# Altium PCB PCB4.PcbDoc
Units mm, origin at the board's own origin, x right, y up, seen from the top; angles counter-clockwise.
Board outline 81.67 x 20.7 mm, 2 copper layers (Top Layer, Bottom Layer), stack 1.671 mm thick; 18 components, 16 nets, 80 pads, 12 vias.
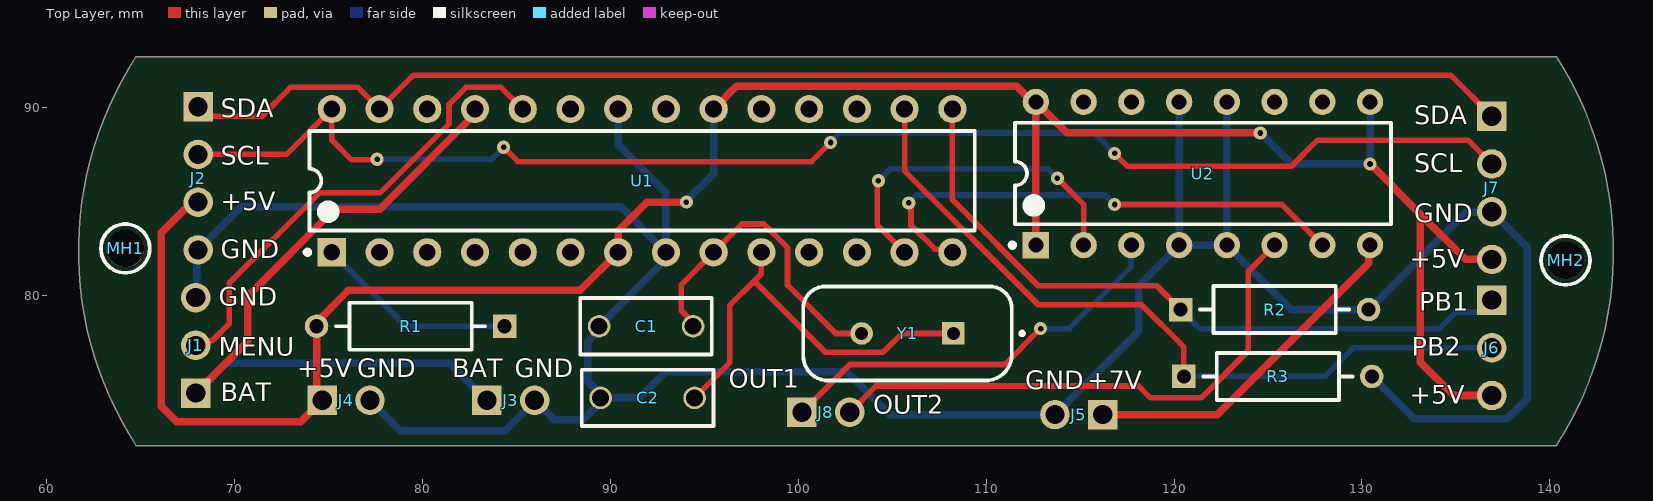
[diagram p0: Top Layer view]
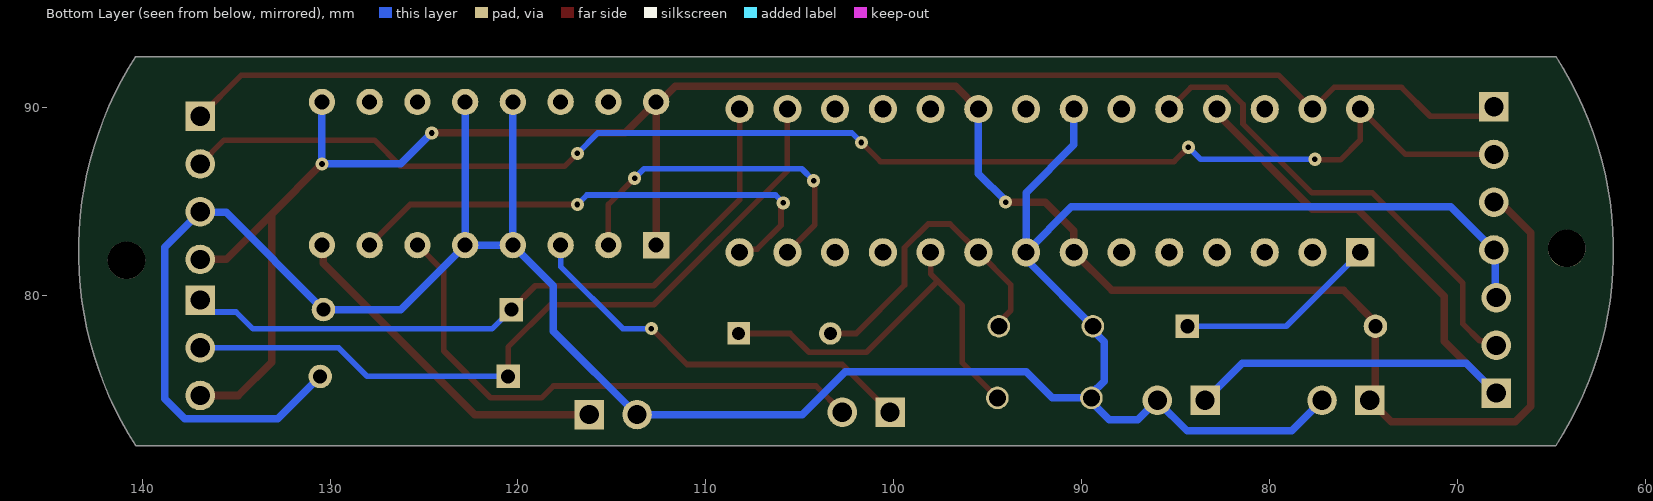
[diagram p1: Bottom Layer view, seen from below]

## Layer stack, top to bottom
Top Solder: solder mask 0.0102, Solder Resist, Dk 3.5
Top Layer: signal copper 0.0356
Dielectric 1: dielectric 1.6, FR-4, Dk 4.8
Bottom Layer: signal copper 0.0356
Bottom Solder: solder mask 0.0102, Solder Resist, Dk 3.5

## Board outline
64.77,72.009 cw(c80.725,82.359) 64.77,92.71 140.335,92.71 cw(c124.287,82.359) 140.335,72.009

## Design rules (kind name [scope] priority, off if disabled: settings)
AssemblyTestpoint [All] p1: testpointundercomponent=TRUE minsize=0.7 maxsize=2.54 preferedsize=0.7 minholesize=0 maxholesize=1.016 preferedholesize=0.3 testpointgrid=0.025 usegrid=TRUE gridtolerance=0 allowsidetop=TRUE allowsidebottom=TRUE
Clearance [All] p1: gap=0.254 ignorepadtopadclearanceinfootprint=FALSE except(0.33: Arc-Hole Track-Hole; 0.5: THPad-THPad)
FabricationTestpoint [All] p1: side=3 testpointundercomponent=TRUE minsize=0.7 maxsize=2.54 preferedsize=0.7 minholesize=0 maxholesize=1.016 preferedholesize=0.3 testpointgrid=0.025 allowsidetop=TRUE allowsidebottom=TRUE usegrid=TRUE gridtolerance=0
HoleSize [All] p1: absolutevalues=TRUE maxlimit=10 minlimit=0.2 maxpercent=80.000 minpercent=20.000
HoleToHoleClearance [All] p1: gap=0.5 allowstackedmicrovias=TRUE
PolygonConnect [All] p1: connectstyle=Relief reliefconductorwidth=0.254 reliefentries=4 polygonreliefangle="90 Angle" airgapwidth=0.254
RoutingVias [All] p1: holewidth=0.711 width=1.27 viastyle="Through Hole" minholewidth=0.3 minwidth=0.5 maxholewidth=0.711 maxwidth=1.27
SolderMaskExpansion [All] p1: expansion=0.102 istentingtop=FALSE
Width Power_nets [InNet('GND') or InNet('BAT') or InNet('+5V') or InNet('7V')] p1: maxlimit=4 minlimit=0.4 preferedwidth=0.4
Width [All] p2: maxlimit=0.5 minlimit=0.3 preferedwidth=0.3
26 further rules are at their usual default settings.

## Components (designator, comment, footprint, x,y, rotation, side; value= is the part's Value field where it differs from the comment)
C1 "22pF" CAPACITOR_22PF 94.408,78.359 r180 top locked
C2 "22pF" CAPACITOR_22PF 94.488,74.549 r180 top locked
J1 "PAD3 1.02X1.57MM" "PAD3 1.02X1.57MM" 67.945,74.803 r180 top
J2 "PAD4 1.02X1.57MM" "PAD4 1.02X1.57MM" 68.072,90.043 r0 top
J3 "PAD2 1.02X1.57MM" "PAD2 1.02X1.57MM" 83.439,74.422 r90 top
J4 "PAD2 1.02X1.57MM" "PAD2 1.02X1.57MM" 74.676,74.422 r90 top
J5 "PAD2 1.02X1.57MM" "PAD2 1.02X1.57MM" 116.205,73.66 r270 top
J6 "PAD3 1.02X1.57MM" "PAD3 1.02X1.57MM" 136.906,79.756 r0 top
J7 "PAD4 1.02X1.57MM" "PAD4 1.02X1.57MM" 136.906,89.535 r0 top
J8 "PAD2 1.02X1.57MM" "PAD2 1.02X1.57MM" 100.203,73.787 r90 top
MH1 "MH" MH 64.169,82.535 r0 top
MH2 "MH" MH 140.8,81.9 r0 top
R1 "1k" resistor 79.375,78.359 r180 top
R2 "1k" resistor 125.349,79.248 r0 top
R3 "1k" resistor 125.523,75.692 r0 top locked
U1 "ATMEGA328-PU" "DIP28 7.62MM" 91.694,86.106 r90 top locked
U2 "L293D" DIP16 121.539,86.487 r90 top locked
Y1 "HC49US16MHz" HC49US16MHz 105.818,77.978 r180 top

## Footprints (in the part's own frame and the unit in brackets; to place one, negate y for a bottom-side part, rotate by r counter-clockwise, add the part's x,y. Pads: shape width x height; smd on the part's side, far side on the other; paste and mask are expansions set on the pad)
CAPACITOR_22PF [mm]
  round 1.2 hole 0.9: 1(0,0) 2(5,0)
  silkscreen extent -1,-1.5 6,1.5
DIP16 [mm]
  rect 1.4x1.4 hole 0.8: 1(-3.81,8.89)
  round 1.4 hole 0.8: 2(-3.81,6.35) 3(-3.81,3.81) 4(-3.81,1.27) 5(-3.81,-1.27) 6(-3.81,-3.81) 7(-3.81,-6.35) 8(-3.81,-8.89) 9(3.81,-8.89) 10(3.81,-6.35) 11(3.81,-3.81) 12(3.81,-1.27) 13(3.81,1.27) 14(3.81,3.81) 15(3.81,6.35) 16(3.81,8.89)
  silkscreen extent -3.93,-10 2.7,10.26, body extent -3.93,-10 3.93,10, height 5.1
"DIP28 7.62MM" [mm]
  rect 1.5x1.5 hole 0.9: 1(-3.81,16.51)
  round 1.5 hole 0.9: 2(-3.81,13.97) 3(-3.81,11.43) 4(-3.81,8.89) 5(-3.81,6.35) 6(-3.81,3.81) 7(-3.81,1.27) 8(-3.81,-1.27) 9(-3.81,-3.81) 10(-3.81,-6.35) 11(-3.81,-8.89) 12(-3.81,-11.43) 13(-3.81,-13.97) 14(-3.81,-16.51) 15(3.81,-16.51) 16(3.81,-13.97) 17(3.81,-11.43) 18(3.81,-8.89) 19(3.81,-6.35) 20(3.81,-3.81) 21(3.81,-1.27) 22(3.81,1.27) 23(3.81,3.81) 24(3.81,6.35) 25(3.81,8.89) 26(3.81,11.43) 27(3.81,13.97) 28(3.81,16.51)
  silkscreen extent -3.93,-17.7 2.65,17.93, body extent -3.94,-17.91 3.94,18.03, height 4.65
HC49US16MHz [mm]
  rect 1.2x1.2 hole 0.7: 1(-2.44,0)
  round 1.2 hole 0.7: 2(2.44,0)
  silkscreen extent -6.2,-2.5 5.55,2.5, body extent -5.4,-2.25 5.4,2.25, height 3.6
MH [mm]
  round 2 hole 2: 1(0.031,-0.035)
  silkscreen extent -1.27,-1.33 1.33,1.26
"PAD2 1.02X1.57MM" [mm]
  rect 1.57x1.57 hole 1.02: 1(0,0)
  round 1.57 hole 1.02: 2(0,-2.54)
"PAD3 1.02X1.57MM" [mm]
  rect 1.57x1.57 hole 1.02: 1(0,0)
  round 1.57 hole 1.02: 2(0,-2.54) 3(0,-5.08)
"PAD4 1.02X1.57MM" [mm]
  rect 1.57x1.57 hole 1.02: 1(0,0)
  round 1.57 hole 1.02: 2(0,-2.54) 3(0,-5.08) 4(0,-7.62)
resistor [mm]
  rect 1.25x1.25 hole 0.75 paste-1000 mask+0: 1(-5,0)
  round 1.25 hole 0.75 paste-1000 mask+0: 2(5,0)
  silkscreen extent -3.98,-1.25 3.98,1.25, body extent -5.72,-1.35 5.72,1.35, height 0.25

## Part data
C1 C2: library part VY1220K31U2JQ63V0, "Cap Ceramic Suppression X1/Y2 22pF 760VAC/500VAC U2J 10% (8 X 5mm) Radial 10mm 125C Bulk", Case/Package=Radial, Dielectric=U2J, Manufacturer="Vishay BCcomponents", Max Operating Temperature=125°C, Min Operating Temperature=-40°C, Package Quantity=1000, Ratings=X1,Y1, Supplier Part Number 1=72-VY1220K31U2JQ63V0, Temperature Coefficient=120ppm/°C, Tolerance=10%, Voltage Rating=500V, Voltage Rating (DC)=250V, Body Diameter=8mm, Capacitance=22pF, Category="Ceramic Capacitors", ComponentLink1Description=https://datasheet.ciiva.com/149/vy1series-149110.pdf?src-supplier=Digi-Key, ComponentLink1URL=https://datasheet.ciiva.com/149/vy1series-149110.pdf?src-supplier=Digi-Key, ComponentLink2Description=https://datasheet.ciiva.com/5711/1339573-5711482.pdf?src-supplier=Farnell, ComponentLink2URL=https://datasheet.ciiva.com/5711/1339573-5711482.pdf?src-supplier=Farnell, Construction=RADIAL, Depth=5mm, Diameter=8mm, Lead Diameter=0.6mm, Lead Length=30mm, Lead Pitch=10mm, Lead/Base Style=Kinked, Manufacturer Part Number=VY1220K31U2JQ63V0, Mount="Through Hole", Number of Pins=2, Packaging=Bulk, Pricing 1="1=0.37000, 10=0.17900, 50=0.17900, 100=0.15300, 1000=0.09400, 10000=0.08100 (USD)", RoHS=Yes, RoHS Compliant=Yes, Series=VY1, Stock 1=27652, Supplier 1=Mouser, Termination=Radial, Thickness=5mm, Voltage Rating (AC)=500V, Width=5mm
R1 R2 R3: library part MRS25000C1001FCT00, "MRS25 Series Axial Thin Film Resistor 1kOhms +/-1% 0.6W +/-50ppm/degC", Case/Package=Axial, Manufacturer=Vishay, Max Operating Temperature=155°C, Max Power Dissipation=600mW, Min Operating Temperature=-55°C, Package Quantity=5000, Resistance=1kR, Resistance Tolerance=1%, Resistor Type="Metal Film,Thin Film", Supplier Part Number 1=594-MRS251K1%TR, Temperature Coefficient=50ppm/°C, Voltage Rating=350V, Category="Through-Hole Resistors", ComponentLink1Description=https://datasheet.ciiva.com/46412/1756157-46412631.pdf?src-supplier=Element14, ComponentLink1URL=https://datasheet.ciiva.com/46412/1756157-46412631.pdf?src-supplier=Element14, ComponentLink2Description=https://datasheet.ciiva.com/28605/1911198-28605880.pdf?src-supplier=Element14, ComponentLink2URL=https://datasheet.ciiva.com/28605/1911198-28605880.pdf?src-supplier=Element14, ComponentLink3Description=https://datasheet.ciiva.com/7836/mrs16m25-7836234.pdf?src-supplier=Element14, ComponentLink3URL=https://datasheet.ciiva.com/7836/mrs16m25-7836234.pdf?src-supplier=Element14, ComponentLink4Description=https://datasheet.ciiva.com/8401/mrs16m25-8401227.pdf?src-supplier=Avnet, ComponentLink4URL=https://datasheet.ciiva.com/8401/mrs16m25-8401227.pdf?src-supplier=Avnet, ComponentLink5Description=https://datasheet.ciiva.com/16464/mrs16m25-16464630.pdf?src-supplier=Future+Electronics, ComponentLink5URL=https://datasheet.ciiva.com/16464/mrs16m25-16464630.pdf?src-supplier=Future+Electronics, Contact Plating=Tin, Diameter=2.5mm, Lead Diameter=0.6mm, Lead Free="Lead Free", Length=6.5mm, Manufacturer Part Number=MRS25000C1001FCT00, Number of Pins=2, Number of Terminations=2, Packaging="Tape and Reel", Power Rating=600mW, Pricing 1="1=0.28000, 10=0.24200, 50=0.24200, 100=0.09500, 1000=0.04000, 10000=0.03300 (USD)", Radiation Hardening=No, Reach SVHC Compliant=Unknown, RoHS=Yes, RoHS Compliant=Yes, Series=MRS25, Stock 1=28607, Supplier 1=Mouser, Technology="THIN FILM", Termination=Axial, Tolerance=1%, Voltage Rating (DC)=350V, Weight=0.00776oz, Width=2.5mm
U1: "ATmega Series 32 kB Flash 2 kB SRAM 20 MHz 8-Bit Microcontroller - DIP-28", Case/Package=PDIP, Frequency=20MHz, Manufacturer=Microchip, Max Operating Temperature=85°C, Max Supply Voltage=5.5V, Min Operating Temperature=-40°C, Min Supply Voltage=1.8V, Supplier Part Number 1=1310277P, Core Architecture=AVR, Data Bus Width=8b, Height=4.572mm, Lead Free="Lead Free", Length=34.8mm, Manufacturer Part Number=ATMEGA328-PU, Max Frequency=20MHz, Memory Size=32KB, Memory Type=FLASH, Mount="Through Hole", Number of ADC Channels=6, Number of I2C Channels=1, Number of I/Os=23, Number of Pins=28, Number of PWM Channels=6, Number of SPI Channels=1, Number of Timers/Counters=3, Peripherals=POR,PWM,WDT, Pricing 1="25=0.41080, 100=0.39560 (GBP)", RAM Size=2KB, Reach SVHC Compliant=No, RoHS=Yes, RoHS Compliant=Yes, Stock 1=871, Supplier 1=Rs, Watchdog Timer=Yes, Width=7.49mm
U2: "IC MOTOR DRIVER PAR 16-DIP", Case/Package=DIP, Manufacturer=STMicroelectronics, Max Collector Current=1.2A, Max Operating Temperature=150°C, Max Supply Voltage=36V, Min Operating Temperature=-40°C, Min Supply Voltage=4.5V, Operating Supply Current=2mA, Operating Supply Voltage=24V, Output Current=600mA, Power Dissipation=4W, Supplier Part Number 1=511-L293D, Category="Motor Drivers", ComponentLink1Description=https://datasheet.ciiva.com/14150/ocl293d-647107-dat-en-14150297.pdf?src-supplier=Distrelec, ComponentLink1URL=https://datasheet.ciiva.com/14150/ocl293d-647107-dat-en-14150297.pdf?src-supplier=Distrelec, ComponentLink2Description=https://datasheet.ciiva.com/15109/getdatasheetpartid-121660-15109379.pdf?src-supplier=Verical, ComponentLink2URL=https://datasheet.ciiva.com/15109/getdatasheetpartid-121660-15109379.pdf?src-supplier=Verical, ComponentLink3Description=https://datasheet.ciiva.com/29307/156134-da-01-en-4-kanal-treiber-ic-l293d-stm-29307000.pdf?src-supplier=Conrad, ComponentLink3URL=https://datasheet.ciiva.com/29307/156134-da-01-en-4-kanal-treiber-ic-l293d-stm-29307000.pdf?src-supplier=Conrad, ComponentLink4Description=https://datasheet.ciiva.com/1955/cd00000059-1955400.pdf?src-supplier=Digi-Key, ComponentLink4URL=https://datasheet.ciiva.com/1955/cd00000059-1955400.pdf?src-supplier=Digi-Key, ComponentLink5Description=https://datasheet.ciiva.com/4895/cd00000059-4895945.pdf?src-supplier=Mouser, ComponentLink5URL=https://datasheet.ciiva.com/4895/cd00000059-4895945.pdf?src-supplier=Mouser, ComponentLink6Description=https://datasheet.ciiva.com/16458/cd00000059-16458220.pdf?src-supplier=Future+Electronics, ComponentLink6URL=https://datasheet.ciiva.com/16458/cd00000059-16458220.pdf?src-supplier=Future+Electronics, Height=5.1mm, Interface=Parallel, Lead Free="Lead Free", Length=20mm, Manufacturer Part Number=L293D, Motor Type=Brushed, Mount="Through Hole", Number of Channels=4, Number of Outputs=2, Number of Pins=16, Packaging=Rail/Tube, Pricing 1="1=8.52000, 10=7.70000, 50=7.34000, 100=6.37000, 1000=5.07000, 10000=5.07000 (USD)", Radiation Hardening=No, RoHS=Yes, RoHS Compliant=Yes, Series=-, Stock 1=664, Supplier 1=Mouser, Width=7.1mm
Y1: library part HC49US16.384MABJ-UB, "CRYSTAL 16.384MHZ 18PF THROUGH HOLE; Frequency: 16.384MHz; Frequency Tolerance: ± 30ppm; Load Capacitance: 18pF;...", ESR (Equivalent Series Resistance)=50R, Frequency=16.384MHz, Frequency Stability=50ppm, Frequency Tolerance=30ppm, Load Capacitance=18pF, Manufacturer=Citizen, Max Operating Temperature=60°C, Min Operating Temperature=-10°C, Operating Frequency="16.384 MHz", Package Quantity=1000, Supplier Part Number 1=1078922, Category=Uncategorized, ComponentLink1Description=https://datasheet.ciiva.com/856/hc-49-u-s-856176.pdf?src-supplier=Digi-Key, ComponentLink1URL=https://datasheet.ciiva.com/856/hc-49-u-s-856176.pdf?src-supplier=Digi-Key, ComponentLink2Description=https://datasheet.ciiva.com/16440/hc-49-u-s-16440933.pdf?src-supplier=Future+Electronics, ComponentLink2URL=https://datasheet.ciiva.com/16440/hc-49-u-s-16440933.pdf?src-supplier=Future+Electronics, ComponentLink3Description=https://datasheet.ciiva.com/28624/9028-28624744.pdf?src-supplier=Element14, ComponentLink3URL=https://datasheet.ciiva.com/28624/9028-28624744.pdf?src-supplier=Element14, Height=0.138inch, Lead Free="Lead Free", Length=0.453inch, Manufacturer Part Number=HC49US16.384MABJ-UB, Mount="Through Hole", Packaging=Bulk, Pricing 1="1000=0.30200 (GBP)", Reach SVHC Compliant=Unknown, RoHS=Yes, Series=HC-49US, Supplier 1=Farnell, Width=0.183inch

## Via types
v1: diameter 0.7, hole 0.3, Top Layer to Bottom Layer, 12 vias

## Nets (pads, with @x,y where several pads share a name; then routed paths per layer and width w, separated by ;. In a path a pad name is that pad's centre, name@x,y a point inside that pad or via, vN(x,y) a via of type N, cw(c..) or ccw(c..) an arc to the next point about the centre after c; other vN are vias at no path point)
7V: J5.1 U2.8 | length 18.5
  Top Layer w0.4: J5.1 122.301,73.66 130.354,81.713 130.354,82.602 U2.8
+5: J2.3 J4.1 J6.3 J7.4 R1.2 U1.7 U1.20 U2.1 U2.9 U2.16 | length 123.1
  Top Layer w0.4: J2.3 67.728,84.963 66.1,83.335 66.1,74.108 66.929,73.279 73.533,73.279 J4.1 74.375,74.723 R1.2 74.375,78.566 76.073,80.264 88.392,80.264 U1.7 90.424,83.439 91.948,84.963 v1(94.053,84.963) ; U1.20 96.708,91.12 111.634,91.12 112.457,90.297 U2.16 ; U2.1 U2.16 ; v1(124.587,88.646) 114.3,88.646 U2.16 ; v1(130.429,86.995) 133.096,84.328 ; J6.3 134.874,74.676 133.096,76.454 133.096,84.328 ; J7.4 135.509,81.915 133.096,84.328
  Bottom Layer w0.4: v1(94.053,84.963) 94.053,85.036 95.504,86.487 U1.20 ; v1(124.587,88.646) 126.238,86.995 v1(130.429,86.995) U2.9
BAT: J1.1 J3.1 U1.25 | length 39.6
  Top Layer w0.4: J1.1 68.53,75.388 70.708,77.566 70.708,79.962 75.328,84.582 77.724,84.582 82.804,89.662 U1.25
  Bottom Layer w0.4: J1.1 69.542,76.4 81.461,76.4 J3.1
GND: C1.2 C2.2 J1.3 J2.4 J3.2 J4.2 J5.2 J7.3 R2.2 R3.2 U1.8 U1.22 U2.4 U2.5 U2.12 U2.13 | length 156.2
  Bottom Layer w0.4: J1.3@67.721,80.107 J1.3 68.008,79.947 68.008,82.359 J2.4 ; J2.4@68.034,82.461 J2.4 ; J4.2 78.838,72.8 84.4,72.8 85.979,74.379 J3.2 87.01,73.391 88.546,73.391 89.488,74.333 C2.2 ; U1.22 90.424,88.011 92.964,85.471 U1.8 ; U2.13 U2.4 ; U2.12 U2.5 ; R3.2 132.778,73.437 137.737,73.437 138.8,74.5 138.8,82.561 J7.3 136.871,84.42 135.521,84.42 R2.2 126.238,79.248 U2.5 ; J2.4 70.358,84.709 90.551,84.709 U1.8 ; C2.2 91.567,74.549 92.964,75.946 102.585,75.946 104.871,73.66 J5.2 118.11,78.105 118.11,80.518 U2.4 ; C2.2 89.488,74.765 88.813,75.44 88.813,77.548 89.408,78.143 C1.2 92.754,81.705 92.754,82.086 U1.8 ; U2.4 U2.5
INPUT1: U1.13 U2.2 | length 18.6
  Top Layer w0.3: v1(104.267,86.106) 104.209,86.048 104.209,83.751 U1.13 ; v1(113.792,86.233) 115.189,84.836 U2.2
  Bottom Layer w0.3: v1(104.267,86.106) 104.902,86.741 113.284,86.741 v1(113.792,86.233)
INPUT2: U1.14 U2.7 | length 27.3
  Top Layer w0.3: v1(105.882,84.927) 106.004,84.804 106.004,83.734 107.274,82.464 108.036,82.464 U1.14 ; v1(116.84,84.836) 125.73,84.836 U2.7
  Bottom Layer w0.3: v1(105.882,84.927) 106.299,85.344 116.332,85.344 v1(116.84,84.836)
MENU: J1.2 U1.24 | length 25.4
  Top Layer w0.3: J1.2 68.188,77.586 68.823,77.586 69.723,78.486 69.723,80.645 74.537,85.459 77.747,85.459 81.418,89.13 81.418,90.162 82.326,91.07 84.19,91.07 U1.24
NetR1_1: R1.1 U1.1 | length 10.8
  Bottom Layer w0.3: U1.1 79.121,78.359 R1.1
OUTPUT1: J8.1 U2.3 | length 21.9
  Top Layer w0.3: J8.1 102.743,76.327 110.998,76.327 v1(112.903,78.232)
  Bottom Layer w0.3: v1(112.903,78.232) 114.427,78.232 117.729,81.534 U2.3
OUTPUT2: J8.2 U2.6 | length 29.3
  Top Layer w0.3: J8.2 104.14,75.184 118.11,75.184 118.745,74.549 121.447,74.549 123.952,77.054 123.952,81.28 U2.6
PB1: J6.1 R2.1 U1.15 | length 37
  Top Layer w0.3: U1.15 108.204,85.09 112.776,80.518 119.079,80.518 R2.1
  Bottom Layer w0.3: R2.1 121.378,78.219 134.099,78.219 135.001,79.121 136.271,79.121 J6.1
PB2: J6.2 R3.1 U1.16 | length 40.6
  Top Layer w0.3: U1.16 105.664,86.614 112.776,79.502 118.274,79.502 120.523,77.253 R3.1
  Bottom Layer w0.3: R3.1 128.018,75.692 129.542,77.216 J6.2
SCL: J2.2 J7.2 U1.28 | length 75
  Top Layer w0.3: J2.2 72.771,87.503 U1.28 75.184,88.265 76.235,87.214 77.562,87.214 v1(77.597,87.249) ; v1(84.328,87.884) 85.09,87.122 100.711,87.122 v1(101.727,88.138) ; v1(116.84,87.557) 117.529,86.868 126.238,86.868 127.635,88.265 135.636,88.265 J7.2
  Bottom Layer w0.3: v1(77.597,87.249) 83.677,87.249 84.312,87.884 v1(84.328,87.884) ; v1(101.727,88.138) 102.235,88.646 115.751,88.646 v1(116.84,87.557)
SDA: J2.1 J7.1 U1.27 | length 71.8
  Top Layer w0.3: J2.1 68.58,89.535 71.455,89.535 72.99,91.07 76.57,91.07 U1.27 79.532,91.724 134.717,91.724 J7.1
XTAL1: C1.1 U1.9 Y1.2 | length 17
  Top Layer w0.3: C1.1 94.408,78.574 93.773,79.209 93.773,80.565 U1.9 97.008,83.8 98.172,83.8 99.43,82.542 99.43,80.55 102.002,77.978 Y1.2
XTAL2: C2.1 U1.10 Y1.1 | length 21.8
  Top Layer w0.3: C2.1 96.352,76.413 96.352,79.461 97.663,80.772 ; U1.10 98.044,81.153 97.663,80.772 ; Y1.1 105.517,77.978 104.513,76.974 101.461,76.974 97.663,80.772
pads on no net: MH1.1 MH2.1 U1.2 U1.3 U1.4 U1.5 U1.6 U1.11 U1.12 U1.17 U1.18 U1.19 U1.21 U1.23 U1.26 U2.10 U2.11 U2.14 U2.15

## Silkscreen, mask and mechanical layers (free items; w line width, h text height)
Top Overlay:
  text "SDA" at 69.288,89.481 h1
  text "SDA" at 132.788,89.1 h1
  text "SCL" at 69.288,86.941 h1
  text "SCL" at 132.788,86.56 h1
  text "+5V" at 69.288,84.528 h1
  text "GND" at 132.788,83.893 h1
  text "GND" at 69.288,81.988 h1
  text "+5V" at 132.534,81.48 h1
  text "GND" at 69.161,79.448 h1
  text "PB1" at 133.042,79.194 h1
  text "MENU" at 69.161,76.781 h1
  text "PB2" at 132.661,76.781 h1
  text "+5V" at 73.352,75.638 h1
  text "GND" at 76.527,75.638 h1
  text "BAT" at 81.607,75.638 h1
  text "GND" at 84.909,75.638 h1
  text "OUT1" at 96.3,75.1 h1
  text "GND" at 112.087,75.003 h1
  text "+7V" at 115.389,75.003 h1
  text "BAT" at 69.288,74.368 h1
  text "+5V" at 132.534,74.241 h1
  text "OUT2" at 104,73.7 h1
Top Assembly:
  the board outline again, w0.2